# Altium PCB 数粒机接收板12通道.PcbDoc (part 4 of 5)
Units mm, origin at the board's own origin, x right, y up, seen from the top; angles counter-clockwise.
Board outline 316 x 52 mm, 2 copper layers (Top Layer, Bottom Layer); 209 components, 115 nets, 614 pads, 284 vias.
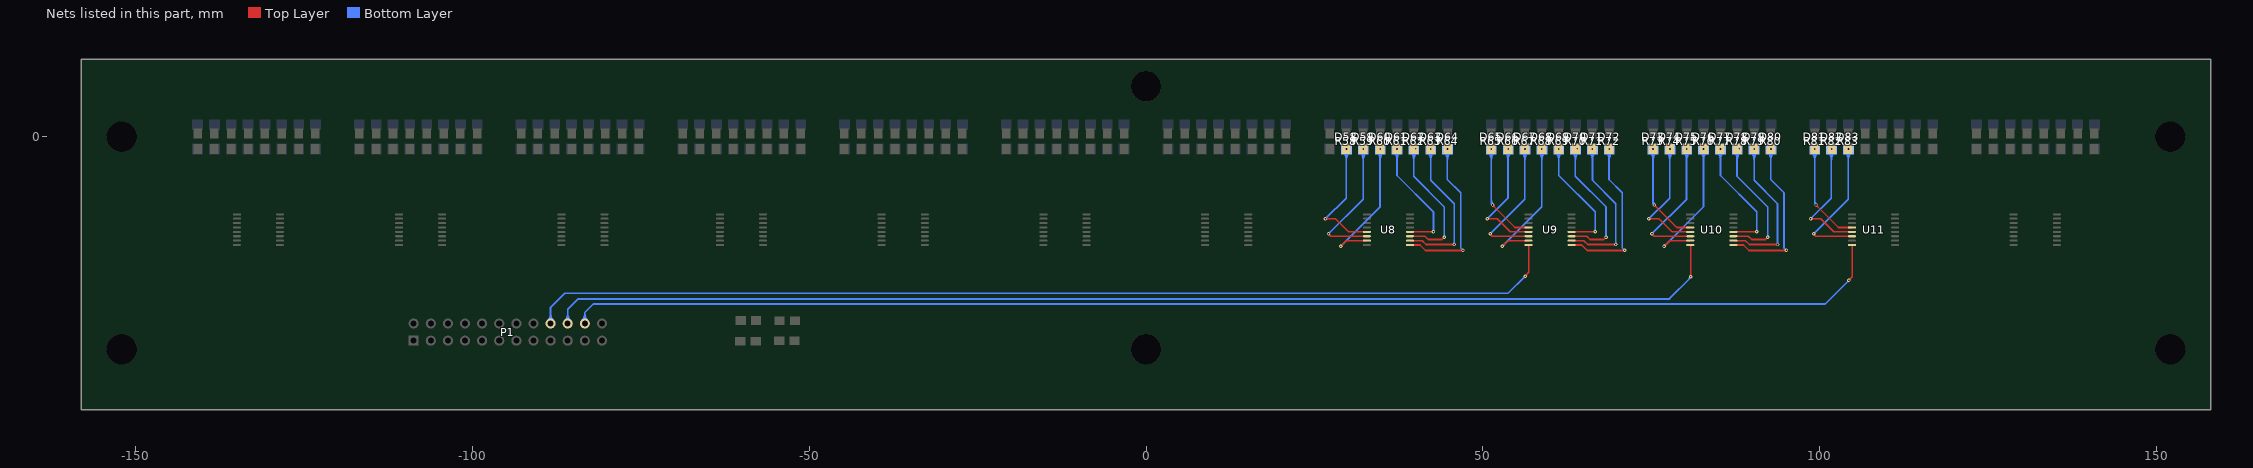
[diagram p4: the nets of this part, all layers, seen from the top]

## Via types
v1: diameter 0.508, hole 0.254, Top Layer to Bottom Layer, 284 vias

## Nets (pads, with @x,y where several pads share a name; then routed paths per layer and width w, separated by ;. In a path a pad name is that pad's centre, name@x,y a point inside that pad or via, vN(x,y) a via of type N, cw(c..) or ccw(c..) an arc to the next point about the centre after c; other vN are vias at no path point) (continued)
CH8-2: D58.1 R58.2 U8.5 | length 34.7
  Top Layer w0.254: v1(26.626,-12.171) 28.125,-12.171 30.054,-14.1 U8.5@32.773,-14.1 ; v1@26.716,-12.26 cw(c26.933,-12.477) 26.933,-12.171 ; v1@26.716,-12.26 cw(c26.933,-12.477) 26.933,-12.171 ; v1@26.716,-12.26 cw(c26.933,-12.477) 26.933,-12.171 ; v1@26.716,-12.081 ccw(c26.933,-11.864) 26.933,-12.171 ; v1@26.716,-12.081 ccw(c26.933,-11.864) 26.933,-12.171 ; v1@26.716,-12.081 ccw(c26.933,-11.864) 26.933,-12.171
  Bottom Layer w0.254: v1(26.626,-12.171) 29.711,-9.086 D58.1@29.711,-2.057 ; v1@26.626,-12.044 ccw(c26.626,-11.737) 26.843,-11.954 ; v1@26.626,-12.044 ccw(c26.626,-11.737) 26.843,-11.954 ; v1@26.626,-12.044 ccw(c26.626,-11.737) 26.843,-11.954 ; v1@26.753,-12.171 cw(c27.06,-12.171) 26.843,-11.954 ; v1@26.753,-12.171 cw(c27.06,-12.171) 26.843,-11.954 ; v1@26.753,-12.171 cw(c27.06,-12.171) 26.843,-11.954 ; D58.1@29.274,-2.276 cw(c28.22,-3.33) 29.711,-3.33 ; D58.1@29.274,-2.276 cw(c28.22,-3.33) 29.711,-3.33 ; D58.1@29.274,-2.276 cw(c28.22,-3.33) 29.711,-3.33 ; D58.1@29.454,-2.096 cw(c28.833,-2.717) 29.711,-2.717 ; D58.1@29.454,-2.096 cw(c28.833,-2.717) 29.711,-2.717 ; D58.1@29.454,-2.096 cw(c28.833,-2.717) 29.711,-2.717 ; 29.711,-3.519 cw(c31.469,-3.519) D58.1@30.226,-2.276 ; 29.711,-3.519 cw(c31.469,-3.519) D58.1@30.226,-2.276 ; 29.711,-3.519 cw(c31.469,-3.519) D58.1@30.226,-2.276 ; 29.711,-2.906 cw(c30.856,-2.906) D58.1@30.046,-2.096 ; 29.711,-2.906 cw(c30.856,-2.906) D58.1@30.046,-2.096 ; 29.711,-2.906 cw(c30.856,-2.906) D58.1@30.046,-2.096 ; D58.1@29.711,-2.201 cw(c30.151,-2.201) D58.1@29.84,-1.89 ; D58.1@29.711,-2.201 cw(c30.151,-2.201) D58.1@29.84,-1.89 ; D58.1@29.711,-2.201 cw(c30.151,-2.201) D58.1@29.84,-1.89
  other v1: 29.75,-1.8
CH8-3: D59.1 R59.2 U8.6 | length 36.1
  Top Layer w0.254: v1(27.083,-14.38) 27.083,-14.431 27.402,-14.75 U8.6@32.773,-14.75 ; v1@27.21,-14.38 ccw(c27.64,-14.38) 27.336,-14.684 ; v1@27.21,-14.38 ccw(c27.64,-14.38) 27.336,-14.684 ; v1@27.21,-14.38 ccw(c27.64,-14.38) 27.336,-14.684
  Bottom Layer w0.254: v1(27.083,-14.38) 32.225,-9.238 D59.1@32.225,-2.071 ; v1@27.083,-14.253 ccw(c27.083,-13.947) 27.3,-14.164 ; v1@27.083,-14.253 ccw(c27.083,-13.947) 27.3,-14.164 ; v1@27.083,-14.253 ccw(c27.083,-13.947) 27.3,-14.164 ; v1@27.21,-14.38 cw(c27.517,-14.38) 27.3,-14.164 ; v1@27.21,-14.38 cw(c27.517,-14.38) 27.3,-14.164 ; v1@27.21,-14.38 cw(c27.517,-14.38) 27.3,-14.164 ; D59.1@31.774,-2.276 cw(c30.685,-3.365) 32.225,-3.365 ; D59.1@31.774,-2.276 cw(c30.685,-3.365) 32.225,-3.365 ; D59.1@31.774,-2.276 cw(c30.685,-3.365) 32.225,-3.365 ; D59.1@31.954,-2.096 cw(c31.298,-2.752) 32.225,-2.752 ; D59.1@31.954,-2.096 cw(c31.298,-2.752) 32.225,-2.752 ; D59.1@31.954,-2.096 cw(c31.298,-2.752) 32.225,-2.752 ; 32.225,-3.484 cw(c33.934,-3.484) D59.1@32.726,-2.276 ; 32.225,-3.484 cw(c33.934,-3.484) D59.1@32.726,-2.276 ; 32.225,-3.484 cw(c33.934,-3.484) D59.1@32.726,-2.276 ; 32.225,-2.871 cw(c33.321,-2.871) D59.1@32.546,-2.096 ; 32.225,-2.871 cw(c33.321,-2.871) D59.1@32.546,-2.096 ; 32.225,-2.871 cw(c33.321,-2.871) D59.1@32.546,-2.096 ; D59.1@32.225,-2.166 cw(c32.616,-2.166) D59.1@32.34,-1.89 ; D59.1@32.225,-2.166 cw(c32.616,-2.166) D59.1@32.34,-1.89 ; D59.1@32.225,-2.166 cw(c32.616,-2.166) D59.1@32.34,-1.89
  other v1: 32.25,-1.8
CH8-4: D60.1 R60.2 U8.7 | length 37.6
  Top Layer w0.254: v1(28.887,-16.237) 29.724,-15.4 U8.7@32.773,-15.4 ; v1@28.887,-16.11 ccw(c28.887,-15.803) 29.104,-16.02 ; v1@28.887,-16.11 ccw(c28.887,-15.803) 29.104,-16.02 ; v1@28.887,-16.11 ccw(c28.887,-15.803) 29.104,-16.02 ; v1@29.014,-16.237 cw(c29.32,-16.237) 29.104,-16.02 ; v1@29.014,-16.237 cw(c29.32,-16.237) 29.104,-16.02 ; v1@29.014,-16.237 cw(c29.32,-16.237) 29.104,-16.02
  Bottom Layer w0.254: v1(28.887,-16.237) 34.74,-10.383 D60.1@34.74,-2.086 ; v1@28.887,-16.11 ccw(c28.887,-15.803) 29.104,-16.02 ; v1@28.887,-16.11 ccw(c28.887,-15.803) 29.104,-16.02 ; v1@28.887,-16.11 ccw(c28.887,-15.803) 29.104,-16.02 ; v1@29.014,-16.237 cw(c29.32,-16.237) 29.104,-16.02 ; v1@29.014,-16.237 cw(c29.32,-16.237) 29.104,-16.02 ; v1@29.014,-16.237 cw(c29.32,-16.237) 29.104,-16.02 ; D60.1@34.274,-2.276 cw(c33.149,-3.401) 34.74,-3.401 ; D60.1@34.274,-2.276 cw(c33.149,-3.401) 34.74,-3.401 ; D60.1@34.274,-2.276 cw(c33.149,-3.401) 34.74,-3.401 ; D60.1@34.454,-2.096 cw(c33.763,-2.787) 34.74,-2.787 ; D60.1@34.454,-2.096 cw(c33.763,-2.787) 34.74,-2.787 ; D60.1@34.454,-2.096 cw(c33.763,-2.787) 34.74,-2.787 ; D60.1@34.66,-1.89 cw(c34.468,-2.082) D60.1@34.74,-2.082 ; D60.1@34.66,-1.89 cw(c34.468,-2.082) D60.1@34.74,-2.082 ; D60.1@34.66,-1.89 cw(c34.468,-2.082) D60.1@34.74,-2.082 ; 34.74,-3.449 cw(c36.399,-3.449) D60.1@35.226,-2.276 ; 34.74,-3.449 cw(c36.399,-3.449) D60.1@35.226,-2.276 ; 34.74,-3.449 cw(c36.399,-3.449) D60.1@35.226,-2.276 ; 34.74,-2.836 cw(c35.786,-2.836) D60.1@35.046,-2.096 ; 34.74,-2.836 cw(c35.786,-2.836) D60.1@35.046,-2.096 ; 34.74,-2.836 cw(c35.786,-2.836) D60.1@35.046,-2.096 ; D60.1@34.74,-2.131 cw(c35.081,-2.131) D60.1@34.84,-1.89 ; D60.1@34.74,-2.131 cw(c35.081,-2.131) D60.1@34.84,-1.89 ; D60.1@34.74,-2.131 cw(c35.081,-2.131) D60.1@34.84,-1.89
  other v1: 34.75,-1.8
CH8-5: D61.1 R61.2 U8.12 | length 33.5
  Top Layer w0.254: U8.12@39.224,-14.1 42.629,-14.1 v1(42.654,-14.076) ; 42.288,-14.1 ccw(c42.288,-13.71) v1@42.564,-13.986 ; 42.288,-14.1 ccw(c42.288,-13.71) v1@42.564,-13.986 ; 42.288,-14.1 ccw(c42.288,-13.71) v1@42.564,-13.986
  Bottom Layer w0.254: D61.1@37.255,-2.05 37.255,-5.73 42.654,-11.129 v1(42.654,-14.076) ; D61.1@36.774,-2.276 cw(c35.614,-3.436) 37.255,-3.436 ; D61.1@36.774,-2.276 cw(c35.614,-3.436) 37.255,-3.436 ; D61.1@36.774,-2.276 cw(c35.614,-3.436) 37.255,-3.436 ; D61.1@36.954,-2.096 cw(c36.227,-2.823) 37.255,-2.823 ; D61.1@36.954,-2.096 cw(c36.227,-2.823) 37.255,-2.823 ; D61.1@36.954,-2.096 cw(c36.227,-2.823) 37.255,-2.823 ; D61.1@37.16,-1.89 cw(c36.932,-2.118) D61.1@37.255,-2.118 ; D61.1@37.16,-1.89 cw(c36.932,-2.118) D61.1@37.255,-2.118 ; D61.1@37.16,-1.89 cw(c36.932,-2.118) D61.1@37.255,-2.118 ; 37.255,-3.414 cw(c38.864,-3.414) D61.1@37.726,-2.276 ; 37.255,-3.414 cw(c38.864,-3.414) D61.1@37.726,-2.276 ; 37.255,-3.414 cw(c38.864,-3.414) D61.1@37.726,-2.276 ; 37.255,-2.8 cw(c38.25,-2.8) D61.1@37.546,-2.096 ; 37.255,-2.8 cw(c38.25,-2.8) D61.1@37.546,-2.096 ; 37.255,-2.8 cw(c38.25,-2.8) D61.1@37.546,-2.096 ; D61.1@37.255,-2.095 cw(c37.545,-2.095) D61.1@37.34,-1.89 ; D61.1@37.255,-2.095 cw(c37.545,-2.095) D61.1@37.34,-1.89 ; D61.1@37.255,-2.095 cw(c37.545,-2.095) D61.1@37.34,-1.89 ; 42.654,-13.769 cw(c42.347,-13.769) 42.564,-13.986 ccw(c42.347,-13.769) 42.654,-13.769 ; 42.654,-13.769 ccw(c42.96,-13.769) 42.743,-13.986 cw(c42.96,-13.769) 42.654,-13.769
  other v1: 37.25,-1.8
CH8-6: D62.1 R62.2 U8.11 | length 34
  Top Layer w0.254: U8.11@39.224,-14.75 41.398,-14.75 41.892,-15.244 43.924,-15.244 v1(44.279,-14.888)
  Bottom Layer w0.254: D62.1@39.718,-2.013 39.718,-5.857 44.279,-10.418 v1(44.279,-14.888) ; D62.1@39.274,-2.276 cw(c38.202,-3.348) 39.718,-3.348 ; D62.1@39.274,-2.276 cw(c38.202,-3.348) 39.718,-3.348 ; D62.1@39.274,-2.276 cw(c38.202,-3.348) 39.718,-3.348 ; D62.1@39.454,-2.096 cw(c38.815,-2.735) 39.718,-2.735 ; D62.1@39.454,-2.096 cw(c38.815,-2.735) 39.718,-2.735 ; D62.1@39.454,-2.096 cw(c38.815,-2.735) 39.718,-2.735 ; 39.718,-3.501 cw(c41.451,-3.501) D62.1@40.226,-2.276 ; 39.718,-3.501 cw(c41.451,-3.501) D62.1@40.226,-2.276 ; 39.718,-3.501 cw(c41.451,-3.501) D62.1@40.226,-2.276 ; 39.718,-2.888 cw(c40.838,-2.888) D62.1@40.046,-2.096 ; 39.718,-2.888 cw(c40.838,-2.888) D62.1@40.046,-2.096 ; 39.718,-2.888 cw(c40.838,-2.888) D62.1@40.046,-2.096 ; v1@44.189,-14.799 ccw(c43.973,-14.582) 44.279,-14.582 ; v1@44.189,-14.799 ccw(c43.973,-14.582) 44.279,-14.582 ; v1@44.189,-14.799 ccw(c43.973,-14.582) 44.279,-14.582 ; 44.279,-14.582 ccw(c44.586,-14.582) v1@44.369,-14.799 ; 44.279,-14.582 ccw(c44.586,-14.582) v1@44.369,-14.799 ; 44.279,-14.582 ccw(c44.586,-14.582) v1@44.369,-14.799
  other v1: 40.026,-1.775
CH8-7: D63.1 R63.2 U8.10 | length 38.9
  Top Layer w0.254: U8.10@39.224,-15.4 40.981,-15.4 41.561,-15.981 v1(45.727,-15.981) ; 45.42,-15.981 cw(c45.42,-16.287) v1@45.637,-16.07 ; 45.42,-15.981 ccw(c45.42,-15.674) v1@45.637,-15.891 ; 45.42,-15.981 cw(c45.42,-16.287) v1@45.637,-16.07 ; 45.42,-15.981 ccw(c45.42,-15.674) v1@45.637,-15.891 ; 45.42,-15.981 ccw(c45.42,-15.674) v1@45.637,-15.891 ; 45.42,-15.981 cw(c45.42,-16.287) v1@45.637,-16.07
  Bottom Layer w0.254: D63.1@42.258,-2.053 42.258,-6.441 45.727,-9.91 v1(45.727,-15.981) ; D63.1@41.774,-2.276 cw(c40.605,-3.445) 42.258,-3.445 ; D63.1@41.774,-2.276 cw(c40.605,-3.445) 42.258,-3.445 ; D63.1@41.774,-2.276 cw(c40.605,-3.445) 42.258,-3.445 ; D63.1@41.954,-2.096 cw(c41.218,-2.832) 42.258,-2.832 ; D63.1@41.954,-2.096 cw(c41.218,-2.832) 42.258,-2.832 ; D63.1@41.954,-2.096 cw(c41.218,-2.832) 42.258,-2.832 ; D63.1@42.16,-1.89 cw(c41.923,-2.127) D63.1@42.258,-2.127 ; D63.1@42.16,-1.89 cw(c41.923,-2.127) D63.1@42.258,-2.127 ; D63.1@42.16,-1.89 cw(c41.923,-2.127) D63.1@42.258,-2.127 ; 42.258,-3.404 cw(c43.854,-3.404) D63.1@42.726,-2.276 ; 42.258,-3.404 cw(c43.854,-3.404) D63.1@42.726,-2.276 ; 42.258,-3.404 cw(c43.854,-3.404) D63.1@42.726,-2.276 ; 42.258,-2.791 cw(c43.241,-2.791) D63.1@42.546,-2.096 ; 42.258,-2.791 cw(c43.241,-2.791) D63.1@42.546,-2.096 ; 42.258,-2.791 cw(c43.241,-2.791) D63.1@42.546,-2.096 ; D63.1@42.258,-2.086 cw(c42.536,-2.086) D63.1@42.34,-1.89 ; D63.1@42.258,-2.086 cw(c42.536,-2.086) D63.1@42.34,-1.89 ; D63.1@42.258,-2.086 cw(c42.536,-2.086) D63.1@42.34,-1.89 ; v1@45.637,-15.891 ccw(c45.42,-15.674) 45.727,-15.674 ; v1@45.637,-15.891 ccw(c45.42,-15.674) 45.727,-15.674 ; v1@45.637,-15.891 ccw(c45.42,-15.674) 45.727,-15.674 ; 45.727,-15.674 ccw(c46.034,-15.674) v1@45.817,-15.891 ; 45.727,-15.674 ccw(c46.034,-15.674) v1@45.817,-15.891 ; 45.727,-15.674 ccw(c46.034,-15.674) v1@45.817,-15.891
  other v1: 42.25,-1.8
CH8-8: D64.1 R64.2 U8.9 | length 38.3
  Top Layer w0.254: U8.9@39.224,-16.05 40.666,-16.05 41.485,-16.87 47.022,-16.87 v1(47.048,-16.844) ; 46.68,-16.87 ccw(c46.68,-16.476) v1@46.958,-16.754 ; 46.68,-16.87 ccw(c46.68,-16.476) v1@46.958,-16.754 ; 46.68,-16.87 ccw(c46.68,-16.476) v1@46.958,-16.754
  Bottom Layer w0.254: D64.1@44.722,-2.017 44.722,-6.34 46.692,-8.31 46.692,-16.489 v1(47.048,-16.844) ; D64.1@44.274,-2.276 cw(c43.192,-3.358) 44.722,-3.358 ; D64.1@44.274,-2.276 cw(c43.192,-3.358) 44.722,-3.358 ; D64.1@44.274,-2.276 cw(c43.192,-3.358) 44.722,-3.358 ; D64.1@44.454,-2.096 cw(c43.806,-2.744) 44.722,-2.744 ; D64.1@44.454,-2.096 cw(c43.806,-2.744) 44.722,-2.744 ; D64.1@44.454,-2.096 cw(c43.806,-2.744) 44.722,-2.744 ; 44.722,-3.492 cw(c46.442,-3.492) D64.1@45.226,-2.276 ; 44.722,-3.492 cw(c46.442,-3.492) D64.1@45.226,-2.276 ; 44.722,-3.492 cw(c46.442,-3.492) D64.1@45.226,-2.276 ; 44.722,-2.879 cw(c45.829,-2.879) D64.1@45.046,-2.096 ; 44.722,-2.879 cw(c45.829,-2.879) D64.1@45.046,-2.096 ; 44.722,-2.879 cw(c45.829,-2.879) D64.1@45.046,-2.096 ; D64.1@44.722,-2.174 cw(c45.124,-2.174) D64.1@44.84,-1.89 ; D64.1@44.722,-2.174 cw(c45.124,-2.174) D64.1@44.84,-1.89 ; D64.1@44.722,-2.174 cw(c45.124,-2.174) D64.1@44.84,-1.89
  other v1: 44.75,-1.8
CH9: P1.18 U9.8 | length 168.4
  Top Layer w0.254: v1(56.266,-20.672) 56.824,-20.114 56.824,-16.101 U9.8@56.773,-16.05 ; v1@56.266,-20.545 ccw(c56.266,-20.239) 56.483,-20.455 ; v1@56.266,-20.545 ccw(c56.266,-20.239) 56.483,-20.455 ; v1@56.266,-20.545 ccw(c56.266,-20.239) 56.483,-20.455 ; v1@56.393,-20.672 cw(c56.699,-20.672) 56.483,-20.455 ; v1@56.393,-20.672 cw(c56.699,-20.672) 56.483,-20.455 ; v1@56.393,-20.672 cw(c56.699,-20.672) 56.483,-20.455 ; U9.8@56.757,-16.066 cw(c56.595,-16.228) 56.824,-16.228 ccw(c56.595,-16.228) U9.8@56.757,-16.066
  Bottom Layer w0.254: P1.18@-88.362,-27.708 -88.362,-25.295 -86.279,-23.212 53.726,-23.212 v1(56.266,-20.672) ; P1.18@-88.802,-27.267 ccw(c-89.866,-26.204) -88.362,-26.204 ; P1.18@-88.802,-27.267 ccw(c-89.866,-26.204) -88.362,-26.204 ; P1.18@-88.802,-27.267 ccw(c-89.866,-26.204) -88.362,-26.204 ; P1.18@-88.623,-27.447 ccw(c-89.253,-26.817) -88.362,-26.817 ; P1.18@-88.623,-27.447 ccw(c-89.253,-26.817) -88.362,-26.817 ; P1.18@-88.623,-27.447 ccw(c-89.253,-26.817) -88.362,-26.817 ; -88.362,-26.817 ccw(c-87.471,-26.817) P1.18@-88.101,-27.447 ; -88.362,-26.817 ccw(c-87.471,-26.817) P1.18@-88.101,-27.447 ; -88.362,-26.817 ccw(c-87.471,-26.817) P1.18@-88.101,-27.447 ; -88.362,-26.204 ccw(c-86.858,-26.204) P1.18@-87.921,-27.267 ; -88.362,-26.204 ccw(c-86.858,-26.204) P1.18@-87.921,-27.267 ; -88.362,-26.204 ccw(c-86.858,-26.204) P1.18@-87.921,-27.267 ; 56.049,-20.889 cw(c56.266,-21.106) v1@56.266,-20.799 ; 56.049,-20.889 ccw(c55.832,-20.672) v1@56.139,-20.672 ; 56.049,-20.889 cw(c56.266,-21.106) v1@56.266,-20.799 ; 56.049,-20.889 ccw(c55.832,-20.672) v1@56.139,-20.672 ; 56.049,-20.889 ccw(c55.832,-20.672) v1@56.139,-20.672 ; 56.049,-20.889 cw(c56.266,-21.106) v1@56.266,-20.799
CH9-1: D65.1 R65.2 U9.4 | length 32.6
  Top Layer w0.254: v1(51.429,-10.111) 54.769,-13.45 U9.4@56.773,-13.45 ; v1@51.429,-10.238 cw(c51.429,-10.544) 51.646,-10.328 ; v1@51.429,-10.238 cw(c51.429,-10.544) 51.646,-10.328 ; v1@51.429,-10.238 cw(c51.429,-10.544) 51.646,-10.328 ; v1@51.556,-10.111 ccw(c51.863,-10.111) 51.646,-10.328 ; v1@51.556,-10.111 ccw(c51.863,-10.111) 51.646,-10.328 ; v1@51.556,-10.111 ccw(c51.863,-10.111) 51.646,-10.328
  Bottom Layer w0.254: D65.1@51.25,-1.8 51.25,-9.931 v1(51.429,-10.111) ; D65.1@50.774,-2.276 cw(c49.625,-3.425) 51.25,-3.425 ; D65.1@50.774,-2.276 cw(c49.625,-3.425) 51.25,-3.425 ; D65.1@50.774,-2.276 cw(c49.625,-3.425) 51.25,-3.425 ; D65.1@50.954,-2.096 cw(c50.238,-2.812) 51.25,-2.812 ; D65.1@50.954,-2.096 cw(c50.238,-2.812) 51.25,-2.812 ; D65.1@50.954,-2.096 cw(c50.238,-2.812) 51.25,-2.812 ; D65.1@51.152,-1.89 cw(c50.916,-2.126) D65.1@51.25,-2.126 ; D65.1@51.152,-1.89 cw(c50.916,-2.126) D65.1@51.25,-2.126 ; D65.1@51.152,-1.89 cw(c50.916,-2.126) D65.1@51.25,-2.126 ; 51.25,-9.371 ccw(c52.169,-9.371) v1@51.519,-10.021 ; 51.25,-9.371 ccw(c52.169,-9.371) v1@51.519,-10.021 ; 51.25,-9.371 ccw(c52.169,-9.371) v1@51.519,-10.021 ; 51.25,-3.425 cw(c52.875,-3.425) D65.1@51.726,-2.276 ; 51.25,-3.425 cw(c52.875,-3.425) D65.1@51.726,-2.276 ; 51.25,-3.425 cw(c52.875,-3.425) D65.1@51.726,-2.276 ; 51.25,-2.812 cw(c52.262,-2.812) D65.1@51.546,-2.096 ; 51.25,-2.812 cw(c52.262,-2.812) D65.1@51.546,-2.096 ; 51.25,-2.812 cw(c52.262,-2.812) D65.1@51.546,-2.096 ; D65.1@51.25,-2.087 cw(c51.53,-2.087) D65.1@51.332,-1.89 ; D65.1@51.25,-2.087 cw(c51.53,-2.087) D65.1@51.332,-1.89 ; D65.1@51.25,-2.087 cw(c51.53,-2.087) D65.1@51.332,-1.89
  other v1: 51.242,-1.8
CH9-2: D66.1 R66.2 U9.5 | length 34.6
  Top Layer w0.254: v1(50.626,-12.171) 52.125,-12.171 54.054,-14.1 U9.5@56.773,-14.1 ; v1@50.716,-12.26 cw(c50.933,-12.477) 50.933,-12.171 ; v1@50.716,-12.26 cw(c50.933,-12.477) 50.933,-12.171 ; v1@50.716,-12.26 cw(c50.933,-12.477) 50.933,-12.171 ; v1@50.716,-12.081 ccw(c50.933,-11.864) 50.933,-12.171 ; v1@50.716,-12.081 ccw(c50.933,-11.864) 50.933,-12.171 ; v1@50.716,-12.081 ccw(c50.933,-11.864) 50.933,-12.171
  Bottom Layer w0.254: v1(50.626,-12.171) 53.711,-9.086 D66.1@53.711,-2.057 ; v1@50.626,-12.044 ccw(c50.626,-11.737) 50.843,-11.954 ; v1@50.626,-12.044 ccw(c50.626,-11.737) 50.843,-11.954 ; v1@50.626,-12.044 ccw(c50.626,-11.737) 50.843,-11.954 ; v1@50.753,-12.171 cw(c51.06,-12.171) 50.843,-11.954 ; v1@50.753,-12.171 cw(c51.06,-12.171) 50.843,-11.954 ; v1@50.753,-12.171 cw(c51.06,-12.171) 50.843,-11.954 ; D66.1@53.274,-2.276 cw(c52.22,-3.33) 53.711,-3.33 ; D66.1@53.274,-2.276 cw(c52.22,-3.33) 53.711,-3.33 ; D66.1@53.274,-2.276 cw(c52.22,-3.33) 53.711,-3.33 ; D66.1@53.454,-2.096 cw(c52.833,-2.717) 53.711,-2.717 ; D66.1@53.454,-2.096 cw(c52.833,-2.717) 53.711,-2.717 ; D66.1@53.454,-2.096 cw(c52.833,-2.717) 53.711,-2.717 ; 53.711,-3.519 cw(c55.469,-3.519) D66.1@54.226,-2.276 ; 53.711,-3.519 cw(c55.469,-3.519) D66.1@54.226,-2.276 ; 53.711,-3.519 cw(c55.469,-3.519) D66.1@54.226,-2.276 ; 53.711,-2.906 cw(c54.856,-2.906) D66.1@54.046,-2.096 ; 53.711,-2.906 cw(c54.856,-2.906) D66.1@54.046,-2.096 ; 53.711,-2.906 cw(c54.856,-2.906) D66.1@54.046,-2.096 ; D66.1@53.711,-2.182 cw(c54.124,-2.182) D66.1@53.832,-1.89 ; D66.1@53.711,-2.182 cw(c54.124,-2.182) D66.1@53.832,-1.89 ; D66.1@53.711,-2.182 cw(c54.124,-2.182) D66.1@53.832,-1.89
  other v1: 53.742,-1.8
CH9-3: D67.1 R67.2 U9.6 | length 36.6
  Top Layer w0.254: v1(51.083,-14.38) 51.083,-14.431 51.402,-14.75 U9.6@56.773,-14.75 ; v1@51.21,-14.38 ccw(c51.64,-14.38) 51.336,-14.684 ; v1@51.21,-14.38 ccw(c51.64,-14.38) 51.336,-14.684 ; v1@51.21,-14.38 ccw(c51.64,-14.38) 51.336,-14.684
  Bottom Layer w0.254: v1(51.083,-14.38) 56.225,-9.238 D67.1@56.225,-2.071 ; v1@51.083,-14.253 ccw(c51.083,-13.947) 51.3,-14.164 ; v1@51.083,-14.253 ccw(c51.083,-13.947) 51.3,-14.164 ; v1@51.083,-14.253 ccw(c51.083,-13.947) 51.3,-14.164 ; v1@51.21,-14.38 cw(c51.517,-14.38) 51.3,-14.164 ; v1@51.21,-14.38 cw(c51.517,-14.38) 51.3,-14.164 ; v1@51.21,-14.38 cw(c51.517,-14.38) 51.3,-14.164 ; D67.1@55.774,-2.276 cw(c54.685,-3.365) 56.225,-3.365 ; D67.1@55.774,-2.276 cw(c54.685,-3.365) 56.225,-3.365 ; D67.1@55.774,-2.276 cw(c54.685,-3.365) 56.225,-3.365 ; D67.1@55.954,-2.096 cw(c55.298,-2.752) 56.225,-2.752 ; D67.1@55.954,-2.096 cw(c55.298,-2.752) 56.225,-2.752 ; D67.1@55.954,-2.096 cw(c55.298,-2.752) 56.225,-2.752 ; D67.1@56.152,-1.89 cw(c55.976,-2.066) D67.1@56.225,-2.066 ; D67.1@56.152,-1.89 cw(c55.976,-2.066) D67.1@56.225,-2.066 ; D67.1@56.152,-1.89 cw(c55.976,-2.066) D67.1@56.225,-2.066 ; 56.225,-3.484 cw(c57.934,-3.484) D67.1@56.726,-2.276 ; 56.225,-3.484 cw(c57.934,-3.484) D67.1@56.726,-2.276 ; 56.225,-3.484 cw(c57.934,-3.484) D67.1@56.726,-2.276 ; 56.225,-2.871 cw(c57.321,-2.871) D67.1@56.546,-2.096 ; 56.225,-2.871 cw(c57.321,-2.871) D67.1@56.546,-2.096 ; 56.225,-2.871 cw(c57.321,-2.871) D67.1@56.546,-2.096 ; D67.1@56.225,-2.147 cw(c56.589,-2.147) D67.1@56.332,-1.89 ; D67.1@56.225,-2.147 cw(c56.589,-2.147) D67.1@56.332,-1.89 ; D67.1@56.225,-2.147 cw(c56.589,-2.147) D67.1@56.332,-1.89
  other v1: 56.242,-1.8
CH9-4: D68.1 R68.2 U9.7 | length 37.6
  Top Layer w0.254: v1(52.887,-16.237) 53.724,-15.4 U9.7@56.773,-15.4 ; v1@52.887,-16.11 ccw(c52.887,-15.803) 53.104,-16.02 ; v1@52.887,-16.11 ccw(c52.887,-15.803) 53.104,-16.02 ; v1@52.887,-16.11 ccw(c52.887,-15.803) 53.104,-16.02 ; v1@53.014,-16.237 cw(c53.32,-16.237) 53.104,-16.02 ; v1@53.014,-16.237 cw(c53.32,-16.237) 53.104,-16.02 ; v1@53.014,-16.237 cw(c53.32,-16.237) 53.104,-16.02
  Bottom Layer w0.254: v1(52.887,-16.237) 58.74,-10.383 D68.1@58.74,-2.086 ; v1@52.887,-16.11 ccw(c52.887,-15.803) 53.104,-16.02 ; v1@52.887,-16.11 ccw(c52.887,-15.803) 53.104,-16.02 ; v1@52.887,-16.11 ccw(c52.887,-15.803) 53.104,-16.02 ; v1@53.014,-16.237 cw(c53.32,-16.237) 53.104,-16.02 ; v1@53.014,-16.237 cw(c53.32,-16.237) 53.104,-16.02 ; v1@53.014,-16.237 cw(c53.32,-16.237) 53.104,-16.02 ; D68.1@58.274,-2.276 cw(c57.149,-3.401) 58.74,-3.401 ; D68.1@58.274,-2.276 cw(c57.149,-3.401) 58.74,-3.401 ; D68.1@58.274,-2.276 cw(c57.149,-3.401) 58.74,-3.401 ; D68.1@58.454,-2.096 cw(c57.763,-2.787) 58.74,-2.787 ; D68.1@58.454,-2.096 cw(c57.763,-2.787) 58.74,-2.787 ; D68.1@58.454,-2.096 cw(c57.763,-2.787) 58.74,-2.787 ; D68.1@58.652,-1.89 cw(c58.441,-2.102) D68.1@58.74,-2.102 ; D68.1@58.652,-1.89 cw(c58.441,-2.102) D68.1@58.74,-2.102 ; D68.1@58.652,-1.89 cw(c58.441,-2.102) D68.1@58.74,-2.102 ; 58.74,-3.449 cw(c60.399,-3.449) D68.1@59.226,-2.276 ; 58.74,-3.449 cw(c60.399,-3.449) D68.1@59.226,-2.276 ; 58.74,-3.449 cw(c60.399,-3.449) D68.1@59.226,-2.276 ; 58.74,-2.836 cw(c59.786,-2.836) D68.1@59.046,-2.096 ; 58.74,-2.836 cw(c59.786,-2.836) D68.1@59.046,-2.096 ; 58.74,-2.836 cw(c59.786,-2.836) D68.1@59.046,-2.096 ; D68.1@58.74,-2.112 cw(c59.054,-2.112) D68.1@58.832,-1.89 ; D68.1@58.74,-2.112 cw(c59.054,-2.112) D68.1@58.832,-1.89 ; D68.1@58.74,-2.112 cw(c59.054,-2.112) D68.1@58.832,-1.89
  other v1: 58.742,-1.8
CH9-5: D69.1 R69.2 U9.12 | length 33.5
  Top Layer w0.254: U9.12@63.224,-14.1 66.629,-14.1 v1(66.654,-14.076) ; 66.288,-14.1 ccw(c66.288,-13.71) v1@66.564,-13.986 ; 66.288,-14.1 ccw(c66.288,-13.71) v1@66.564,-13.986 ; 66.288,-14.1 ccw(c66.288,-13.71) v1@66.564,-13.986
  Bottom Layer w0.254: D69.1@61.255,-2.05 61.255,-5.73 66.654,-11.129 v1(66.654,-14.076) ; D69.1@60.774,-2.276 cw(c59.614,-3.436) 61.255,-3.436 ; D69.1@60.774,-2.276 cw(c59.614,-3.436) 61.255,-3.436 ; D69.1@60.774,-2.276 cw(c59.614,-3.436) 61.255,-3.436 ; D69.1@60.954,-2.096 cw(c60.227,-2.823) 61.255,-2.823 ; D69.1@60.954,-2.096 cw(c60.227,-2.823) 61.255,-2.823 ; D69.1@60.954,-2.096 cw(c60.227,-2.823) 61.255,-2.823 ; D69.1@61.152,-1.89 cw(c60.905,-2.137) D69.1@61.255,-2.137 ; D69.1@61.152,-1.89 cw(c60.905,-2.137) D69.1@61.255,-2.137 ; D69.1@61.152,-1.89 cw(c60.905,-2.137) D69.1@61.255,-2.137 ; 61.255,-3.414 cw(c62.864,-3.414) D69.1@61.726,-2.276 ; 61.255,-3.414 cw(c62.864,-3.414) D69.1@61.726,-2.276 ; 61.255,-3.414 cw(c62.864,-3.414) D69.1@61.726,-2.276 ; 61.255,-2.8 cw(c62.25,-2.8) D69.1@61.546,-2.096 ; 61.255,-2.8 cw(c62.25,-2.8) D69.1@61.546,-2.096 ; 61.255,-2.8 cw(c62.25,-2.8) D69.1@61.546,-2.096 ; D69.1@61.255,-2.076 cw(c61.518,-2.076) D69.1@61.332,-1.89 ; D69.1@61.255,-2.076 cw(c61.518,-2.076) D69.1@61.332,-1.89 ; D69.1@61.255,-2.076 cw(c61.518,-2.076) D69.1@61.332,-1.89 ; 66.654,-13.769 cw(c66.347,-13.769) 66.564,-13.986 ccw(c66.347,-13.769) 66.654,-13.769 ; 66.654,-13.769 ccw(c66.96,-13.769) 66.743,-13.986 cw(c66.96,-13.769) 66.654,-13.769
  other v1: 61.242,-1.8
CH9-6: D70.1 R70.2 U9.11 | length 34
  Top Layer w0.254: U9.11@63.224,-14.75 65.398,-14.75 65.892,-15.244 67.924,-15.244 v1(68.279,-14.888)
  Bottom Layer w0.254: D70.1@63.718,-2.013 63.718,-5.857 68.279,-10.418 v1(68.279,-14.888) ; D70.1@63.274,-2.276 cw(c62.202,-3.348) 63.718,-3.348 ; D70.1@63.274,-2.276 cw(c62.202,-3.348) 63.718,-3.348 ; D70.1@63.274,-2.276 cw(c62.202,-3.348) 63.718,-3.348 ; D70.1@63.454,-2.096 cw(c62.815,-2.735) 63.718,-2.735 ; D70.1@63.454,-2.096 cw(c62.815,-2.735) 63.718,-2.735 ; D70.1@63.454,-2.096 cw(c62.815,-2.735) 63.718,-2.735 ; 63.718,-3.501 cw(c65.451,-3.501) D70.1@64.226,-2.276 ; 63.718,-3.501 cw(c65.451,-3.501) D70.1@64.226,-2.276 ; 63.718,-3.501 cw(c65.451,-3.501) D70.1@64.226,-2.276 ; 63.718,-2.888 cw(c64.838,-2.888) D70.1@64.046,-2.096 ; 63.718,-2.888 cw(c64.838,-2.888) D70.1@64.046,-2.096 ; 63.718,-2.888 cw(c64.838,-2.888) D70.1@64.046,-2.096 ; v1@68.189,-14.799 ccw(c67.973,-14.582) 68.279,-14.582 ; v1@68.189,-14.799 ccw(c67.973,-14.582) 68.279,-14.582 ; v1@68.189,-14.799 ccw(c67.973,-14.582) 68.279,-14.582 ; 68.279,-14.582 ccw(c68.586,-14.582) v1@68.369,-14.799 ; 68.279,-14.582 ccw(c68.586,-14.582) v1@68.369,-14.799 ; 68.279,-14.582 ccw(c68.586,-14.582) v1@68.369,-14.799
  other v1: 64.018,-1.775
CH9-7: D71.1 R71.2 U9.10 | length 38.9
  Top Layer w0.254: U9.10@63.224,-15.4 64.981,-15.4 65.561,-15.981 v1(69.727,-15.981) ; 69.42,-15.981 cw(c69.42,-16.287) v1@69.637,-16.07 ; 69.42,-15.981 ccw(c69.42,-15.674) v1@69.637,-15.891 ; 69.42,-15.981 cw(c69.42,-16.287) v1@69.637,-16.07 ; 69.42,-15.981 ccw(c69.42,-15.674) v1@69.637,-15.891 ; 69.42,-15.981 ccw(c69.42,-15.674) v1@69.637,-15.891 ; 69.42,-15.981 cw(c69.42,-16.287) v1@69.637,-16.07
  Bottom Layer w0.254: D71.1@66.258,-2.053 66.258,-6.441 69.727,-9.91 v1(69.727,-15.981) ; D71.1@65.774,-2.276 cw(c64.605,-3.445) 66.258,-3.445 ; D71.1@65.774,-2.276 cw(c64.605,-3.445) 66.258,-3.445 ; D71.1@65.774,-2.276 cw(c64.605,-3.445) 66.258,-3.445 ; D71.1@65.954,-2.096 cw(c65.218,-2.832) 66.258,-2.832 ; D71.1@65.954,-2.096 cw(c65.218,-2.832) 66.258,-2.832 ; D71.1@65.954,-2.096 cw(c65.218,-2.832) 66.258,-2.832 ; D71.1@66.152,-1.89 cw(c65.896,-2.146) D71.1@66.258,-2.146 ; D71.1@66.152,-1.89 cw(c65.896,-2.146) D71.1@66.258,-2.146 ; D71.1@66.152,-1.89 cw(c65.896,-2.146) D71.1@66.258,-2.146 ; 66.258,-3.404 cw(c67.854,-3.404) D71.1@66.726,-2.276 ; 66.258,-3.404 cw(c67.854,-3.404) D71.1@66.726,-2.276 ; 66.258,-3.404 cw(c67.854,-3.404) D71.1@66.726,-2.276 ; 66.258,-2.791 cw(c67.241,-2.791) D71.1@66.546,-2.096 ; 66.258,-2.791 cw(c67.241,-2.791) D71.1@66.546,-2.096 ; 66.258,-2.791 cw(c67.241,-2.791) D71.1@66.546,-2.096 ; D71.1@66.258,-2.067 cw(c66.509,-2.067) D71.1@66.332,-1.89 ; D71.1@66.258,-2.067 cw(c66.509,-2.067) D71.1@66.332,-1.89 ; D71.1@66.258,-2.067 cw(c66.509,-2.067) D71.1@66.332,-1.89 ; v1@69.637,-15.891 ccw(c69.42,-15.674) 69.727,-15.674 ; v1@69.637,-15.891 ccw(c69.42,-15.674) 69.727,-15.674 ; v1@69.637,-15.891 ccw(c69.42,-15.674) 69.727,-15.674 ; 69.727,-15.674 ccw(c70.034,-15.674) v1@69.817,-15.891 ; 69.727,-15.674 ccw(c70.034,-15.674) v1@69.817,-15.891 ; 69.727,-15.674 ccw(c70.034,-15.674) v1@69.817,-15.891
  other v1: 66.242,-1.8
CH9-8: D72.1 R72.2 U9.9 | length 38.8
  Top Layer w0.254: U9.9@63.224,-16.05 64.666,-16.05 65.485,-16.87 71.022,-16.87 v1(71.048,-16.844) ; 70.68,-16.87 ccw(c70.68,-16.476) v1@70.958,-16.754 ; 70.68,-16.87 ccw(c70.68,-16.476) v1@70.958,-16.754 ; 70.68,-16.87 ccw(c70.68,-16.476) v1@70.958,-16.754
  Bottom Layer w0.254: D72.1@68.722,-2.017 68.722,-6.34 70.692,-8.31 70.692,-16.489 v1(71.048,-16.844) ; D72.1@68.274,-2.276 cw(c67.192,-3.358) 68.722,-3.358 ; D72.1@68.274,-2.276 cw(c67.192,-3.358) 68.722,-3.358 ; D72.1@68.274,-2.276 cw(c67.192,-3.358) 68.722,-3.358 ; D72.1@68.454,-2.096 cw(c67.806,-2.744) 68.722,-2.744 ; D72.1@68.454,-2.096 cw(c67.806,-2.744) 68.722,-2.744 ; D72.1@68.454,-2.096 cw(c67.806,-2.744) 68.722,-2.744 ; D72.1@68.652,-1.89 cw(c68.483,-2.059) D72.1@68.722,-2.059 ; D72.1@68.652,-1.89 cw(c68.483,-2.059) D72.1@68.722,-2.059 ; D72.1@68.652,-1.89 cw(c68.483,-2.059) D72.1@68.722,-2.059 ; 68.722,-3.492 cw(c70.442,-3.492) D72.1@69.226,-2.276 ; 68.722,-3.492 cw(c70.442,-3.492) D72.1@69.226,-2.276 ; 68.722,-3.492 cw(c70.442,-3.492) D72.1@69.226,-2.276 ; 68.722,-2.879 cw(c69.829,-2.879) D72.1@69.046,-2.096 ; 68.722,-2.879 cw(c69.829,-2.879) D72.1@69.046,-2.096 ; 68.722,-2.879 cw(c69.829,-2.879) D72.1@69.046,-2.096 ; D72.1@68.722,-2.155 cw(c69.097,-2.155) D72.1@68.832,-1.89 ; D72.1@68.722,-2.155 cw(c69.097,-2.155) D72.1@68.832,-1.89 ; D72.1@68.722,-2.155 cw(c69.097,-2.155) D72.1@68.832,-1.89
  other v1: 68.742,-1.8
CH10: P1.20 U10.8 | length 190.4
  Top Layer w0.254: U10.8@80.773,-16.05 80.824,-16.101 v1(80.824,-20.745) v1@80.904,-20.825 ; v1@80.734,-20.655 ccw(c80.517,-20.438) 80.824,-20.438 ; v1@80.734,-20.655 ccw(c80.517,-20.438) 80.824,-20.438 ; v1@80.734,-20.655 ccw(c80.517,-20.438) 80.824,-20.438 ; 80.824,-20.438 ccw(c81.13,-20.438) v1@80.914,-20.655 ; 80.824,-20.438 ccw(c81.13,-20.438) v1@80.914,-20.655 ; 80.824,-20.438 ccw(c81.13,-20.438) v1@80.914,-20.655 ; U10.8@80.757,-16.066 cw(c80.595,-16.228) 80.824,-16.228 ccw(c80.595,-16.228) U10.8@80.757,-16.066
  Bottom Layer w0.254: P1.20@-85.822,-27.708 -85.822,-25.6 -84.272,-24.05 77.678,-24.05 80.853,-20.875 80.853,-20.774 v1(80.824,-20.745) ; P1.20@-86.262,-27.267 ccw(c-87.326,-26.204) -85.822,-26.204 ; P1.20@-86.262,-27.267 ccw(c-87.326,-26.204) -85.822,-26.204 ; P1.20@-86.262,-27.267 ccw(c-87.326,-26.204) -85.822,-26.204 ; P1.20@-86.083,-27.447 ccw(c-86.713,-26.817) -85.822,-26.817 ; P1.20@-86.083,-27.447 ccw(c-86.713,-26.817) -85.822,-26.817 ; P1.20@-86.083,-27.447 ccw(c-86.713,-26.817) -85.822,-26.817 ; -85.822,-26.817 ccw(c-84.931,-26.817) P1.20@-85.561,-27.447 ; -85.822,-26.817 ccw(c-84.931,-26.817) P1.20@-85.561,-27.447 ; -85.822,-26.817 ccw(c-84.931,-26.817) P1.20@-85.561,-27.447 ; -85.822,-26.204 ccw(c-84.318,-26.204) P1.20@-85.381,-27.267 ; -85.822,-26.204 ccw(c-84.318,-26.204) P1.20@-85.381,-27.267 ; -85.822,-26.204 ccw(c-84.318,-26.204) P1.20@-85.381,-27.267 ; 80.494,-21.235 ccw(c80.004,-20.745) v1@80.697,-20.745 ; 80.494,-21.235 ccw(c80.004,-20.745) v1@80.697,-20.745 ; 80.494,-21.235 ccw(c80.004,-20.745) v1@80.697,-20.745
CH10-1: D73.1 R73.2 U10.4 | length 32.6
  Top Layer w0.254: v1(75.429,-10.111) 78.769,-13.45 U10.4@80.773,-13.45 ; v1@75.429,-10.238 cw(c75.429,-10.544) 75.646,-10.328 ; v1@75.429,-10.238 cw(c75.429,-10.544) 75.646,-10.328 ; v1@75.429,-10.238 cw(c75.429,-10.544) 75.646,-10.328 ; v1@75.556,-10.111 ccw(c75.863,-10.111) 75.646,-10.328 ; v1@75.556,-10.111 ccw(c75.863,-10.111) 75.646,-10.328 ; v1@75.556,-10.111 ccw(c75.863,-10.111) 75.646,-10.328
  Bottom Layer w0.254: v1(75.25,-1.8) 75.25,-9.931 v1(75.429,-10.111) ; D73.1@74.774,-2.276 cw(c73.625,-3.425) 75.25,-3.425 ; D73.1@74.774,-2.276 cw(c73.625,-3.425) 75.25,-3.425 ; D73.1@74.774,-2.276 cw(c73.625,-3.425) 75.25,-3.425 ; D73.1@74.954,-2.096 cw(c74.239,-2.812) 75.25,-2.812 ; D73.1@74.954,-2.096 cw(c74.239,-2.812) 75.25,-2.812 ; D73.1@74.954,-2.096 cw(c74.239,-2.812) 75.25,-2.812 ; D73.1@75.16,-1.89 cw(c74.943,-2.107) D73.1@75.25,-2.107 ; D73.1@75.16,-1.89 cw(c74.943,-2.107) D73.1@75.25,-2.107 ; D73.1@75.16,-1.89 cw(c74.943,-2.107) D73.1@75.25,-2.107 ; 75.25,-9.371 ccw(c76.169,-9.371) v1@75.519,-10.021 ; 75.25,-9.371 ccw(c76.169,-9.371) v1@75.519,-10.021 ; 75.25,-9.371 ccw(c76.169,-9.371) v1@75.519,-10.021 ; 75.25,-3.425 cw(c76.875,-3.425) D73.1@75.726,-2.276 ; 75.25,-3.425 cw(c76.875,-3.425) D73.1@75.726,-2.276 ; 75.25,-3.425 cw(c76.875,-3.425) D73.1@75.726,-2.276 ; 75.25,-2.812 cw(c76.262,-2.812) D73.1@75.546,-2.096 ; 75.25,-2.812 cw(c76.262,-2.812) D73.1@75.546,-2.096 ; 75.25,-2.812 cw(c76.262,-2.812) D73.1@75.546,-2.096 ; D73.1@75.25,-2.107 cw(c75.557,-2.107) D73.1@75.34,-1.89 ; D73.1@75.25,-2.107 cw(c75.557,-2.107) D73.1@75.34,-1.89 ; D73.1@75.25,-2.107 cw(c75.557,-2.107) D73.1@75.34,-1.89
CH10-2: D74.1 R74.2 U10.5 | length 34.7
  Top Layer w0.254: v1(74.626,-12.171) 76.125,-12.171 78.054,-14.1 U10.5@80.773,-14.1 ; v1@74.716,-12.26 cw(c74.933,-12.477) 74.933,-12.171 ; v1@74.716,-12.26 cw(c74.933,-12.477) 74.933,-12.171 ; v1@74.716,-12.26 cw(c74.933,-12.477) 74.933,-12.171 ; v1@74.716,-12.081 ccw(c74.933,-11.864) 74.933,-12.171 ; v1@74.716,-12.081 ccw(c74.933,-11.864) 74.933,-12.171 ; v1@74.716,-12.081 ccw(c74.933,-11.864) 74.933,-12.171
  Bottom Layer w0.254: v1(74.626,-12.171) 77.711,-9.086 D74.1@77.711,-2.057 ; v1@74.626,-12.044 ccw(c74.626,-11.737) 74.843,-11.954 ; v1@74.626,-12.044 ccw(c74.626,-11.737) 74.843,-11.954 ; v1@74.626,-12.044 ccw(c74.626,-11.737) 74.843,-11.954 ; v1@74.753,-12.171 cw(c75.06,-12.171) 74.843,-11.954 ; v1@74.753,-12.171 cw(c75.06,-12.171) 74.843,-11.954 ; v1@74.753,-12.171 cw(c75.06,-12.171) 74.843,-11.954 ; D74.1@77.274,-2.276 cw(c76.22,-3.33) 77.711,-3.33 ; D74.1@77.274,-2.276 cw(c76.22,-3.33) 77.711,-3.33 ; D74.1@77.274,-2.276 cw(c76.22,-3.33) 77.711,-3.33 ; D74.1@77.454,-2.096 cw(c76.833,-2.717) 77.711,-2.717 ; D74.1@77.454,-2.096 cw(c76.833,-2.717) 77.711,-2.717 ; D74.1@77.454,-2.096 cw(c76.833,-2.717) 77.711,-2.717 ; 77.711,-3.519 cw(c79.469,-3.519) D74.1@78.226,-2.276 ; 77.711,-3.519 cw(c79.469,-3.519) D74.1@78.226,-2.276 ; 77.711,-3.519 cw(c79.469,-3.519) D74.1@78.226,-2.276 ; 77.711,-2.906 cw(c78.856,-2.906) D74.1@78.046,-2.096 ; 77.711,-2.906 cw(c78.856,-2.906) D74.1@78.046,-2.096 ; 77.711,-2.906 cw(c78.856,-2.906) D74.1@78.046,-2.096 ; D74.1@77.711,-2.201 cw(c78.151,-2.201) D74.1@77.84,-1.89 ; D74.1@77.711,-2.201 cw(c78.151,-2.201) D74.1@77.84,-1.89 ; D74.1@77.711,-2.201 cw(c78.151,-2.201) D74.1@77.84,-1.89
  other v1: 77.75,-1.8
CH10-3: D75.1 R75.2 U10.6 | length 36.1
  Top Layer w0.254: v1(75.083,-14.38) 75.083,-14.431 75.402,-14.75 U10.6@80.773,-14.75 ; v1@75.21,-14.38 ccw(c75.64,-14.38) 75.336,-14.684 ; v1@75.21,-14.38 ccw(c75.64,-14.38) 75.336,-14.684 ; v1@75.21,-14.38 ccw(c75.64,-14.38) 75.336,-14.684
  Bottom Layer w0.254: v1(75.083,-14.38) 80.225,-9.238 D75.1@80.225,-2.071 ; v1@75.083,-14.253 ccw(c75.083,-13.947) 75.3,-14.164 ; v1@75.083,-14.253 ccw(c75.083,-13.947) 75.3,-14.164 ; v1@75.083,-14.253 ccw(c75.083,-13.947) 75.3,-14.164 ; v1@75.21,-14.38 cw(c75.517,-14.38) 75.3,-14.164 ; v1@75.21,-14.38 cw(c75.517,-14.38) 75.3,-14.164 ; v1@75.21,-14.38 cw(c75.517,-14.38) 75.3,-14.164 ; D75.1@79.774,-2.276 cw(c78.685,-3.365) 80.225,-3.365 ; D75.1@79.774,-2.276 cw(c78.685,-3.365) 80.225,-3.365 ; D75.1@79.774,-2.276 cw(c78.685,-3.365) 80.225,-3.365 ; D75.1@79.954,-2.096 cw(c79.298,-2.752) 80.225,-2.752 ; D75.1@79.954,-2.096 cw(c79.298,-2.752) 80.225,-2.752 ; D75.1@79.954,-2.096 cw(c79.298,-2.752) 80.225,-2.752 ; 80.225,-3.484 cw(c81.934,-3.484) D75.1@80.726,-2.276 ; 80.225,-3.484 cw(c81.934,-3.484) D75.1@80.726,-2.276 ; 80.225,-3.484 cw(c81.934,-3.484) D75.1@80.726,-2.276 ; 80.225,-2.871 cw(c81.321,-2.871) D75.1@80.546,-2.096 ; 80.225,-2.871 cw(c81.321,-2.871) D75.1@80.546,-2.096 ; 80.225,-2.871 cw(c81.321,-2.871) D75.1@80.546,-2.096 ; D75.1@80.225,-2.166 cw(c80.616,-2.166) D75.1@80.34,-1.89 ; D75.1@80.225,-2.166 cw(c80.616,-2.166) D75.1@80.34,-1.89 ; D75.1@80.225,-2.166 cw(c80.616,-2.166) D75.1@80.34,-1.89
  other v1: 80.25,-1.8
CH10-4: D76.1 R76.2 U10.7 | length 37.6
  Top Layer w0.254: v1(76.887,-16.237) 77.724,-15.4 U10.7@80.773,-15.4 ; v1@76.887,-16.11 ccw(c76.887,-15.803) 77.104,-16.02 ; v1@76.887,-16.11 ccw(c76.887,-15.803) 77.104,-16.02 ; v1@76.887,-16.11 ccw(c76.887,-15.803) 77.104,-16.02 ; v1@77.014,-16.237 cw(c77.32,-16.237) 77.104,-16.02 ; v1@77.014,-16.237 cw(c77.32,-16.237) 77.104,-16.02 ; v1@77.014,-16.237 cw(c77.32,-16.237) 77.104,-16.02
  Bottom Layer w0.254: v1(76.887,-16.237) 82.74,-10.383 D76.1@82.74,-2.086 ; v1@76.887,-16.11 ccw(c76.887,-15.803) 77.104,-16.02 ; v1@76.887,-16.11 ccw(c76.887,-15.803) 77.104,-16.02 ; v1@76.887,-16.11 ccw(c76.887,-15.803) 77.104,-16.02 ; v1@77.014,-16.237 cw(c77.32,-16.237) 77.104,-16.02 ; v1@77.014,-16.237 cw(c77.32,-16.237) 77.104,-16.02 ; v1@77.014,-16.237 cw(c77.32,-16.237) 77.104,-16.02 ; D76.1@82.274,-2.276 cw(c81.149,-3.401) 82.74,-3.401 ; D76.1@82.274,-2.276 cw(c81.149,-3.401) 82.74,-3.401 ; D76.1@82.274,-2.276 cw(c81.149,-3.401) 82.74,-3.401 ; D76.1@82.454,-2.096 cw(c81.763,-2.787) 82.74,-2.787 ; D76.1@82.454,-2.096 cw(c81.763,-2.787) 82.74,-2.787 ; D76.1@82.454,-2.096 cw(c81.763,-2.787) 82.74,-2.787 ; D76.1@82.66,-1.89 cw(c82.468,-2.082) D76.1@82.74,-2.082 ; D76.1@82.66,-1.89 cw(c82.468,-2.082) D76.1@82.74,-2.082 ; D76.1@82.66,-1.89 cw(c82.468,-2.082) D76.1@82.74,-2.082 ; 82.74,-3.449 cw(c84.399,-3.449) D76.1@83.226,-2.276 ; 82.74,-3.449 cw(c84.399,-3.449) D76.1@83.226,-2.276 ; 82.74,-3.449 cw(c84.399,-3.449) D76.1@83.226,-2.276 ; 82.74,-2.836 cw(c83.786,-2.836) D76.1@83.046,-2.096 ; 82.74,-2.836 cw(c83.786,-2.836) D76.1@83.046,-2.096 ; 82.74,-2.836 cw(c83.786,-2.836) D76.1@83.046,-2.096 ; D76.1@82.74,-2.131 cw(c83.081,-2.131) D76.1@82.84,-1.89 ; D76.1@82.74,-2.131 cw(c83.081,-2.131) D76.1@82.84,-1.89 ; D76.1@82.74,-2.131 cw(c83.081,-2.131) D76.1@82.84,-1.89
  other v1: 82.75,-1.8
CH10-5: D77.1 R77.2 U10.12 | length 33.5
  Top Layer w0.254: U10.12@87.224,-14.1 90.629,-14.1 v1(90.654,-14.076) ; 90.288,-14.1 ccw(c90.288,-13.71) v1@90.564,-13.986 ; 90.288,-14.1 ccw(c90.288,-13.71) v1@90.564,-13.986 ; 90.288,-14.1 ccw(c90.288,-13.71) v1@90.564,-13.986
  Bottom Layer w0.254: D77.1@85.255,-2.05 85.255,-5.73 90.654,-11.129 v1(90.654,-14.076) ; D77.1@84.774,-2.276 cw(c83.614,-3.436) 85.255,-3.436 ; D77.1@84.774,-2.276 cw(c83.614,-3.436) 85.255,-3.436 ; D77.1@84.774,-2.276 cw(c83.614,-3.436) 85.255,-3.436 ; D77.1@84.954,-2.096 cw(c84.227,-2.823) 85.255,-2.823 ; D77.1@84.954,-2.096 cw(c84.227,-2.823) 85.255,-2.823 ; D77.1@84.954,-2.096 cw(c84.227,-2.823) 85.255,-2.823 ; D77.1@85.16,-1.89 cw(c84.932,-2.118) D77.1@85.255,-2.118 ; D77.1@85.16,-1.89 cw(c84.932,-2.118) D77.1@85.255,-2.118 ; D77.1@85.16,-1.89 cw(c84.932,-2.118) D77.1@85.255,-2.118 ; 85.255,-3.414 cw(c86.864,-3.414) D77.1@85.726,-2.276 ; 85.255,-3.414 cw(c86.864,-3.414) D77.1@85.726,-2.276 ; 85.255,-3.414 cw(c86.864,-3.414) D77.1@85.726,-2.276 ; 85.255,-2.8 cw(c86.25,-2.8) D77.1@85.546,-2.096 ; 85.255,-2.8 cw(c86.25,-2.8) D77.1@85.546,-2.096 ; 85.255,-2.8 cw(c86.25,-2.8) D77.1@85.546,-2.096 ; D77.1@85.255,-2.095 cw(c85.546,-2.095) D77.1@85.34,-1.89 ; D77.1@85.255,-2.095 cw(c85.546,-2.095) D77.1@85.34,-1.89 ; D77.1@85.255,-2.095 cw(c85.546,-2.095) D77.1@85.34,-1.89 ; 90.654,-13.769 cw(c90.347,-13.769) 90.564,-13.986 ccw(c90.347,-13.769) 90.654,-13.769 ; 90.654,-13.769 ccw(c90.96,-13.769) 90.743,-13.986 cw(c90.96,-13.769) 90.654,-13.769
  other v1: 85.25,-1.8
CH10-6: D78.1 R78.2 U10.11 | length 34
  Top Layer w0.254: U10.11@87.224,-14.75 89.398,-14.75 89.892,-15.244 91.924,-15.244 v1(92.279,-14.888)
  Bottom Layer w0.254: D78.1@87.718,-2.013 87.718,-5.857 92.279,-10.418 v1(92.279,-14.888) ; D78.1@87.274,-2.276 cw(c86.202,-3.348) 87.718,-3.348 ; D78.1@87.274,-2.276 cw(c86.202,-3.348) 87.718,-3.348 ; D78.1@87.274,-2.276 cw(c86.202,-3.348) 87.718,-3.348 ; D78.1@87.454,-2.096 cw(c86.815,-2.735) 87.718,-2.735 ; D78.1@87.454,-2.096 cw(c86.815,-2.735) 87.718,-2.735 ; D78.1@87.454,-2.096 cw(c86.815,-2.735) 87.718,-2.735 ; 87.718,-3.501 cw(c89.451,-3.501) D78.1@88.226,-2.276 ; 87.718,-3.501 cw(c89.451,-3.501) D78.1@88.226,-2.276 ; 87.718,-3.501 cw(c89.451,-3.501) D78.1@88.226,-2.276 ; 87.718,-2.888 cw(c88.838,-2.888) D78.1@88.046,-2.096 ; 87.718,-2.888 cw(c88.838,-2.888) D78.1@88.046,-2.096 ; 87.718,-2.888 cw(c88.838,-2.888) D78.1@88.046,-2.096 ; v1@92.189,-14.799 ccw(c91.973,-14.582) 92.279,-14.582 ; v1@92.189,-14.799 ccw(c91.973,-14.582) 92.279,-14.582 ; v1@92.189,-14.799 ccw(c91.973,-14.582) 92.279,-14.582 ; 92.279,-14.582 ccw(c92.586,-14.582) v1@92.369,-14.799 ; 92.279,-14.582 ccw(c92.586,-14.582) v1@92.369,-14.799 ; 92.279,-14.582 ccw(c92.586,-14.582) v1@92.369,-14.799
  other v1: 88.026,-1.775
CH10-7: D79.1 R79.2 U10.10 | length 38.9
  Top Layer w0.254: U10.10@87.224,-15.4 88.981,-15.4 89.561,-15.981 v1(93.727,-15.981) ; 93.42,-15.981 cw(c93.42,-16.287) v1@93.637,-16.07 ; 93.42,-15.981 ccw(c93.42,-15.674) v1@93.637,-15.891 ; 93.42,-15.981 cw(c93.42,-16.287) v1@93.637,-16.07 ; 93.42,-15.981 ccw(c93.42,-15.674) v1@93.637,-15.891 ; 93.42,-15.981 ccw(c93.42,-15.674) v1@93.637,-15.891 ; 93.42,-15.981 cw(c93.42,-16.287) v1@93.637,-16.07
  Bottom Layer w0.254: D79.1@90.258,-2.053 90.258,-6.441 93.727,-9.91 v1(93.727,-15.981) ; D79.1@89.774,-2.276 cw(c88.605,-3.445) 90.258,-3.445 ; D79.1@89.774,-2.276 cw(c88.605,-3.445) 90.258,-3.445 ; D79.1@89.774,-2.276 cw(c88.605,-3.445) 90.258,-3.445 ; D79.1@89.954,-2.096 cw(c89.218,-2.832) 90.258,-2.832 ; D79.1@89.954,-2.096 cw(c89.218,-2.832) 90.258,-2.832 ; D79.1@89.954,-2.096 cw(c89.218,-2.832) 90.258,-2.832 ; D79.1@90.16,-1.89 cw(c89.923,-2.127) D79.1@90.258,-2.127 ; D79.1@90.16,-1.89 cw(c89.923,-2.127) D79.1@90.258,-2.127 ; D79.1@90.16,-1.89 cw(c89.923,-2.127) D79.1@90.258,-2.127 ; 90.258,-3.404 cw(c91.854,-3.404) D79.1@90.726,-2.276 ; 90.258,-3.404 cw(c91.854,-3.404) D79.1@90.726,-2.276 ; 90.258,-3.404 cw(c91.854,-3.404) D79.1@90.726,-2.276 ; 90.258,-2.791 cw(c91.241,-2.791) D79.1@90.546,-2.096 ; 90.258,-2.791 cw(c91.241,-2.791) D79.1@90.546,-2.096 ; 90.258,-2.791 cw(c91.241,-2.791) D79.1@90.546,-2.096 ; D79.1@90.258,-2.086 cw(c90.536,-2.086) D79.1@90.34,-1.89 ; D79.1@90.258,-2.086 cw(c90.536,-2.086) D79.1@90.34,-1.89 ; D79.1@90.258,-2.086 cw(c90.536,-2.086) D79.1@90.34,-1.89 ; v1@93.637,-15.891 ccw(c93.42,-15.674) 93.727,-15.674 ; v1@93.637,-15.891 ccw(c93.42,-15.674) 93.727,-15.674 ; v1@93.637,-15.891 ccw(c93.42,-15.674) 93.727,-15.674 ; 93.727,-15.674 ccw(c94.034,-15.674) v1@93.817,-15.891 ; 93.727,-15.674 ccw(c94.034,-15.674) v1@93.817,-15.891 ; 93.727,-15.674 ccw(c94.034,-15.674) v1@93.817,-15.891
  other v1: 90.25,-1.8
CH10-8: D80.1 R80.2 U10.9 | length 38.3
  Top Layer w0.254: U10.9@87.224,-16.05 88.666,-16.05 89.485,-16.87 95.022,-16.87 v1(95.048,-16.844) ; 94.68,-16.87 ccw(c94.68,-16.476) v1@94.958,-16.754 ; 94.68,-16.87 ccw(c94.68,-16.476) v1@94.958,-16.754 ; 94.68,-16.87 ccw(c94.68,-16.476) v1@94.958,-16.754
  Bottom Layer w0.254: D80.1@92.722,-2.017 92.722,-6.34 94.692,-8.31 94.692,-16.489 v1(95.048,-16.844) ; D80.1@92.274,-2.276 cw(c91.192,-3.358) 92.722,-3.358 ; D80.1@92.274,-2.276 cw(c91.192,-3.358) 92.722,-3.358 ; D80.1@92.274,-2.276 cw(c91.192,-3.358) 92.722,-3.358 ; D80.1@92.454,-2.096 cw(c91.806,-2.744) 92.722,-2.744 ; D80.1@92.454,-2.096 cw(c91.806,-2.744) 92.722,-2.744 ; D80.1@92.454,-2.096 cw(c91.806,-2.744) 92.722,-2.744 ; 92.722,-3.492 cw(c94.442,-3.492) D80.1@93.226,-2.276 ; 92.722,-3.492 cw(c94.442,-3.492) D80.1@93.226,-2.276 ; 92.722,-3.492 cw(c94.442,-3.492) D80.1@93.226,-2.276 ; 92.722,-2.879 cw(c93.829,-2.879) D80.1@93.046,-2.096 ; 92.722,-2.879 cw(c93.829,-2.879) D80.1@93.046,-2.096 ; 92.722,-2.879 cw(c93.829,-2.879) D80.1@93.046,-2.096 ; D80.1@92.722,-2.174 cw(c93.124,-2.174) D80.1@92.84,-1.89 ; D80.1@92.722,-2.174 cw(c93.124,-2.174) D80.1@92.84,-1.89 ; D80.1@92.722,-2.174 cw(c93.124,-2.174) D80.1@92.84,-1.89
  other v1: 92.75,-1.8
CH11: P1.22 U11.8 | length 211.2
  Top Layer w0.254: v1(104.323,-21.282) 104.824,-20.781 104.824,-16.101 U11.8@104.773,-16.05 ; v1@104.323,-21.155 ccw(c104.323,-20.848) 104.539,-21.065 ; v1@104.323,-21.155 ccw(c104.323,-20.848) 104.539,-21.065 ; v1@104.323,-21.155 ccw(c104.323,-20.848) 104.539,-21.065 ; v1@104.45,-21.282 cw(c104.756,-21.282) 104.539,-21.065 ; v1@104.45,-21.282 cw(c104.756,-21.282) 104.539,-21.065 ; v1@104.45,-21.282 cw(c104.756,-21.282) 104.539,-21.065 ; U11.8@104.757,-16.066 cw(c104.595,-16.228) 104.824,-16.228 ccw(c104.595,-16.228) U11.8@104.757,-16.066
  Bottom Layer w0.254: P1.22@-83.282,-27.708 -83.282,-26.057 -82.037,-24.812 100.792,-24.812 v1(104.323,-21.282) ; P1.22@-83.722,-27.267 ccw(c-84.786,-26.204) -83.282,-26.204 ; P1.22@-83.722,-27.267 ccw(c-84.786,-26.204) -83.282,-26.204 ; P1.22@-83.722,-27.267 ccw(c-84.786,-26.204) -83.282,-26.204 ; P1.22@-83.543,-27.447 ccw(c-84.173,-26.817) -83.282,-26.817 ; P1.22@-83.543,-27.447 ccw(c-84.173,-26.817) -83.282,-26.817 ; P1.22@-83.543,-27.447 ccw(c-84.173,-26.817) -83.282,-26.817 ; -83.282,-26.817 ccw(c-82.391,-26.817) P1.22@-83.021,-27.447 ; -83.282,-26.817 ccw(c-82.391,-26.817) P1.22@-83.021,-27.447 ; -83.282,-26.817 ccw(c-82.391,-26.817) P1.22@-83.021,-27.447 ; -83.282,-26.204 ccw(c-81.778,-26.204) P1.22@-82.841,-27.267 ; -83.282,-26.204 ccw(c-81.778,-26.204) P1.22@-82.841,-27.267 ; -83.282,-26.204 ccw(c-81.778,-26.204) P1.22@-82.841,-27.267 ; 104.106,-21.499 cw(c104.323,-21.715) v1@104.323,-21.409 ; 104.106,-21.499 ccw(c103.889,-21.282) v1@104.196,-21.282 ; 104.106,-21.499 cw(c104.323,-21.715) v1@104.323,-21.409 ; 104.106,-21.499 ccw(c103.889,-21.282) v1@104.196,-21.282 ; 104.106,-21.499 ccw(c103.889,-21.282) v1@104.196,-21.282 ; 104.106,-21.499 cw(c104.323,-21.715) v1@104.323,-21.409
CH11-1: D81.1 R81.2 U11.4 | length 32.6
  Top Layer w0.254: v1(99.429,-10.111) 102.769,-13.45 U11.4@104.773,-13.45 ; v1@99.429,-10.238 cw(c99.429,-10.544) 99.646,-10.328 ; v1@99.429,-10.238 cw(c99.429,-10.544) 99.646,-10.328 ; v1@99.429,-10.238 cw(c99.429,-10.544) 99.646,-10.328 ; v1@99.556,-10.111 ccw(c99.863,-10.111) 99.646,-10.328 ; v1@99.556,-10.111 ccw(c99.863,-10.111) 99.646,-10.328 ; v1@99.556,-10.111 ccw(c99.863,-10.111) 99.646,-10.328
  Bottom Layer w0.254: v1(99.25,-1.8) 99.25,-9.931 v1(99.429,-10.111) ; D81.1@98.774,-2.276 cw(c97.625,-3.425) 99.25,-3.425 ; D81.1@98.774,-2.276 cw(c97.625,-3.425) 99.25,-3.425 ; D81.1@98.774,-2.276 cw(c97.625,-3.425) 99.25,-3.425 ; D81.1@98.954,-2.096 cw(c98.239,-2.811) 99.25,-2.811 ; D81.1@98.954,-2.096 cw(c98.239,-2.811) 99.25,-2.811 ; D81.1@98.954,-2.096 cw(c98.239,-2.811) 99.25,-2.811 ; D81.1@99.16,-1.89 cw(c98.943,-2.107) D81.1@99.25,-2.107 ; D81.1@99.16,-1.89 cw(c98.943,-2.107) D81.1@99.25,-2.107 ; D81.1@99.16,-1.89 cw(c98.943,-2.107) D81.1@99.25,-2.107 ; 99.25,-9.371 ccw(c100.169,-9.371) v1@99.519,-10.021 ; 99.25,-9.371 ccw(c100.169,-9.371) v1@99.519,-10.021 ; 99.25,-9.371 ccw(c100.169,-9.371) v1@99.519,-10.021 ; 99.25,-3.425 cw(c100.875,-3.425) D81.1@99.726,-2.276 ; 99.25,-3.425 cw(c100.875,-3.425) D81.1@99.726,-2.276 ; 99.25,-3.425 cw(c100.875,-3.425) D81.1@99.726,-2.276 ; 99.25,-2.812 cw(c100.262,-2.812) D81.1@99.546,-2.096 ; 99.25,-2.812 cw(c100.262,-2.812) D81.1@99.546,-2.096 ; 99.25,-2.812 cw(c100.262,-2.812) D81.1@99.546,-2.096 ; D81.1@99.25,-2.107 cw(c99.557,-2.107) D81.1@99.34,-1.89 ; D81.1@99.25,-2.107 cw(c99.557,-2.107) D81.1@99.34,-1.89 ; D81.1@99.25,-2.107 cw(c99.557,-2.107) D81.1@99.34,-1.89
CH11-2: D82.1 R82.2 U11.5 | length 34.7
  Top Layer w0.254: v1(98.626,-12.171) 100.125,-12.171 102.054,-14.1 U11.5@104.773,-14.1 ; v1@98.716,-12.26 cw(c98.933,-12.477) 98.933,-12.171 ; v1@98.716,-12.26 cw(c98.933,-12.477) 98.933,-12.171 ; v1@98.716,-12.26 cw(c98.933,-12.477) 98.933,-12.171 ; v1@98.716,-12.081 ccw(c98.933,-11.864) 98.933,-12.171 ; v1@98.716,-12.081 ccw(c98.933,-11.864) 98.933,-12.171 ; v1@98.716,-12.081 ccw(c98.933,-11.864) 98.933,-12.171
  Bottom Layer w0.254: v1(98.626,-12.171) 101.711,-9.086 D82.1@101.711,-2.057 ; v1@98.626,-12.044 ccw(c98.626,-11.737) 98.843,-11.954 ; v1@98.626,-12.044 ccw(c98.626,-11.737) 98.843,-11.954 ; v1@98.626,-12.044 ccw(c98.626,-11.737) 98.843,-11.954 ; v1@98.753,-12.171 cw(c99.06,-12.171) 98.843,-11.954 ; v1@98.753,-12.171 cw(c99.06,-12.171) 98.843,-11.954 ; v1@98.753,-12.171 cw(c99.06,-12.171) 98.843,-11.954 ; D82.1@101.274,-2.276 cw(c100.22,-3.33) 101.711,-3.33 ; D82.1@101.274,-2.276 cw(c100.22,-3.33) 101.711,-3.33 ; D82.1@101.274,-2.276 cw(c100.22,-3.33) 101.711,-3.33 ; D82.1@101.454,-2.096 cw(c100.833,-2.717) 101.711,-2.717 ; D82.1@101.454,-2.096 cw(c100.833,-2.717) 101.711,-2.717 ; D82.1@101.454,-2.096 cw(c100.833,-2.717) 101.711,-2.717 ; 101.711,-3.519 cw(c103.469,-3.519) D82.1@102.226,-2.276 ; 101.711,-3.519 cw(c103.469,-3.519) D82.1@102.226,-2.276 ; 101.711,-3.519 cw(c103.469,-3.519) D82.1@102.226,-2.276 ; 101.711,-2.906 cw(c102.856,-2.906) D82.1@102.046,-2.096 ; 101.711,-2.906 cw(c102.856,-2.906) D82.1@102.046,-2.096 ; 101.711,-2.906 cw(c102.856,-2.906) D82.1@102.046,-2.096 ; D82.1@101.711,-2.201 cw(c102.151,-2.201) D82.1@101.84,-1.89 ; D82.1@101.711,-2.201 cw(c102.151,-2.201) D82.1@101.84,-1.89 ; D82.1@101.711,-2.201 cw(c102.151,-2.201) D82.1@101.84,-1.89
  other v1: 101.75,-1.8
CH11-3: D83.1 R83.2 U11.6 | length 36.1
  Top Layer w0.254: v1(99.083,-14.38) 99.083,-14.431 99.402,-14.75 U11.6@104.773,-14.75 ; v1@99.21,-14.38 ccw(c99.64,-14.38) 99.336,-14.684 ; v1@99.21,-14.38 ccw(c99.64,-14.38) 99.336,-14.684 ; v1@99.21,-14.38 ccw(c99.64,-14.38) 99.336,-14.684
  Bottom Layer w0.254: v1(99.083,-14.38) 104.225,-9.238 D83.1@104.225,-2.071 ; v1@99.083,-14.253 ccw(c99.083,-13.947) 99.3,-14.164 ; v1@99.083,-14.253 ccw(c99.083,-13.947) 99.3,-14.164 ; v1@99.083,-14.253 ccw(c99.083,-13.947) 99.3,-14.164 ; v1@99.21,-14.38 cw(c99.517,-14.38) 99.3,-14.164 ; v1@99.21,-14.38 cw(c99.517,-14.38) 99.3,-14.164 ; v1@99.21,-14.38 cw(c99.517,-14.38) 99.3,-14.164 ; D83.1@103.774,-2.276 cw(c102.685,-3.365) 104.225,-3.365 ; D83.1@103.774,-2.276 cw(c102.685,-3.365) 104.225,-3.365 ; D83.1@103.774,-2.276 cw(c102.685,-3.365) 104.225,-3.365 ; D83.1@103.954,-2.096 cw(c103.298,-2.752) 104.225,-2.752 ; D83.1@103.954,-2.096 cw(c103.298,-2.752) 104.225,-2.752 ; D83.1@103.954,-2.096 cw(c103.298,-2.752) 104.225,-2.752 ; 104.225,-3.484 cw(c105.934,-3.484) D83.1@104.726,-2.276 ; 104.225,-3.484 cw(c105.934,-3.484) D83.1@104.726,-2.276 ; 104.225,-3.484 cw(c105.934,-3.484) D83.1@104.726,-2.276 ; 104.225,-2.871 cw(c105.321,-2.871) D83.1@104.546,-2.096 ; 104.225,-2.871 cw(c105.321,-2.871) D83.1@104.546,-2.096 ; 104.225,-2.871 cw(c105.321,-2.871) D83.1@104.546,-2.096 ; D83.1@104.225,-2.166 cw(c104.616,-2.166) D83.1@104.34,-1.89 ; D83.1@104.225,-2.166 cw(c104.616,-2.166) D83.1@104.34,-1.89 ; D83.1@104.225,-2.166 cw(c104.616,-2.166) D83.1@104.34,-1.89
  other v1: 104.25,-1.8